# Altium PCB PCB4.PcbDoc
Units mil, origin at the board's own origin, x right, y up, seen from the top; angles counter-clockwise.
Board outline 5950.03 x 2950.03 mil, 2 copper layers (Top Layer, Bottom Layer); 86 components, 57 nets, 223 pads, 23 vias.
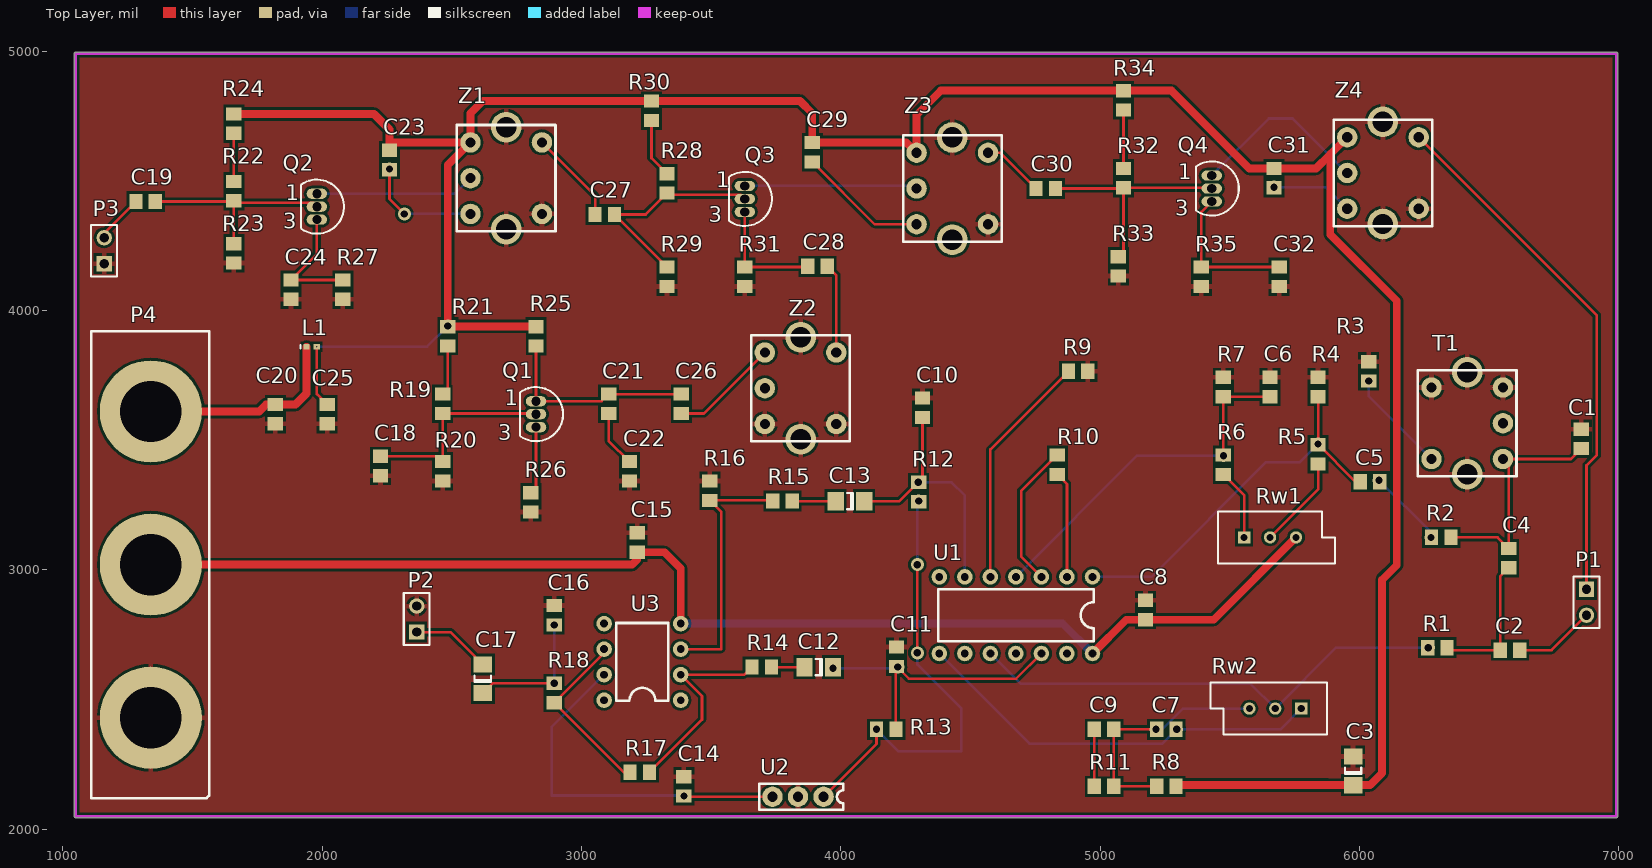
[diagram p0: Top Layer view]
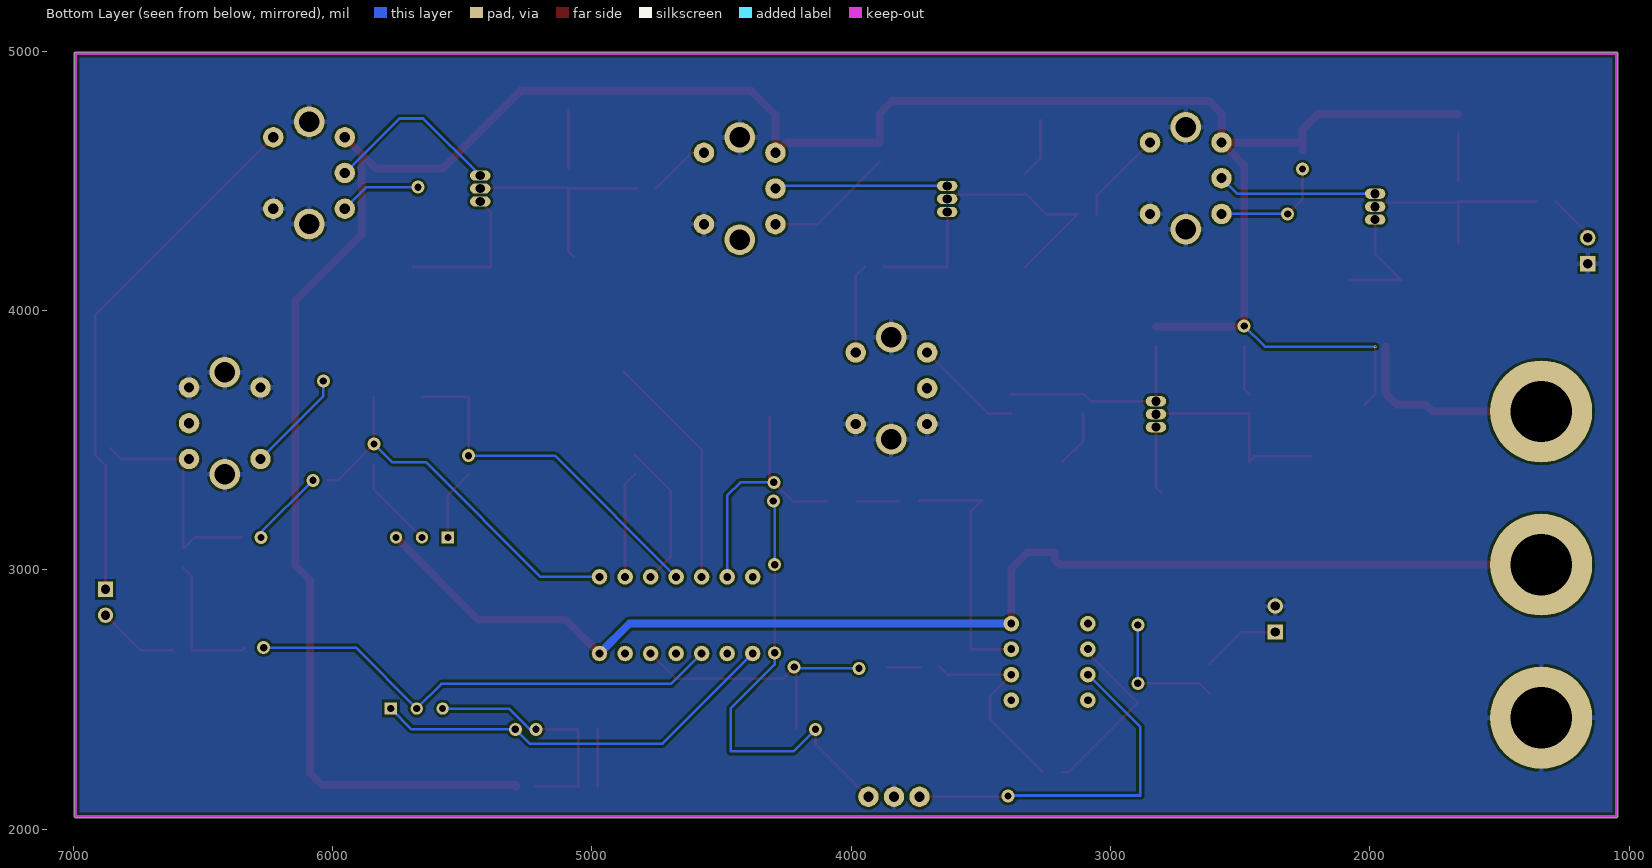
[diagram p1: Bottom Layer view, seen from below]

## Layer stack, top to bottom
Top Layer: signal copper 1.4
Dielectric: dielectric 12.6, FR-4, Dk 4.8
Bottom Layer: signal copper 1.4

## Board outline
1050,2044.98 cw(c1050,2050) 1044.98,2050 1044.98,4990 cw(c1050,4990) 1050,4995.02 6990,4995.02 cw(c6990,4990) 6995.02,4990 6995.02,2050 cw(c6990,2050) 6990,2044.98

## Design rules (kind name [scope] priority, off if disabled: settings)
Clearance [All] p1: gap=10
HoleSize [All] p1: absolutevalues=TRUE maxlimit=1000 minlimit=1 maxpercent=80.000 minpercent=20.000
HoleToHoleClearance [All] p1: gap=1 allowstackedmicrovias=TRUE
MinimumSolderMaskSliver [All] p1: minsoldermaskwidth=1
PolygonConnect [All] p1: connectstyle=Relief reliefconductorwidth=20 reliefentries=4 polygonreliefangle="90 Angle"
RoutingVias [All] p1: holewidth=28 width=50 viastyle="Through Hole" minholewidth=28 minwidth=50 maxholewidth=28 maxwidth=50
SilkscreenOverComponentPads [All] p1: minsilkscreentomaskgap=10
SolderMaskExpansion [All] p1: expansion=4
TestPointUsage [All] p1: valid=0 allowmultiple=FALSE
Testpoint [All] p1: side=15 testpointundercomponent=TRUE minsize=40 maxsize=100 preferedsize=60 minholesize=0 maxholesize=40 preferedholesize=32 testpointgrid=1 style=1023 order=0-112345678
Width [All] p1: maxlimit=100 minlimit=10 preferedwidth=10 toplayer_prefwidth=15 bottomlayer_prefwidth=15 minimp=50.000000 maximp=50.000000 favimp=50.000000
20 further rules are at their usual default settings.

## Classes and differential pairs
component class Sheet1: C1 C2 C3 C4 C5 C6 C7 C8 C9 C10 C11 C12 C13 C14 C15 C16 C17 P1 P2 R1 R2 R3 R4 R5 R6 R7 R8 R9 R10 R11 R12 R13 R14 R15 R16 R17 R18 Rw1 Rw2 T1 U1 U2 U3
component class Sheet2: C18 C19 C20 C21 C22 C23 C24 C25 C26 C27 C28 C29 C30 C31 C32 L1 P3 P4 Q1 Q2 Q3 Q4 R19 R20 R21 R22 R23 R24 R25 R26 R27 R28 R29 R30 R31 R32 R33 R34 R35 Z1 Z2 Z3 Z4

## Components (designator, comment, footprint, x,y, rotation, side; value= is the part's Value field where it differs from the comment)
C1 "Cap" 2012[0805] 6855,3505 r270 top
C2 "Cap" 2012[0805] 6580,2690 r180 top
C3 "Cap Pol1" C1206 5975,2225 r90 top
C4 "Cap" 2012[0805] 6575,3045 r270 top
C5 "Cap" 2012[0805] 6040,3340 r180 top
C6 "Cap" 2012[0805] 5655,3705 r270 top
C7 "Cap" 2012[0805] 5255,2385 r180 top
C8 "Cap" 2012[0805] 5175,2845 r270 top
C9 "Cap" 2012[0805] 5015,2385 r180 top
C10 "Cap" 2012[0805] 4315,3625 r270 top
C11 "Cap" 2012[0805] 4215,2665 r270 top
C12 "Cap Pol1" C1206 3915,2625 r180 top
C13 "Cap Pol1" C1206 4035,3265 r180 top
C14 "Cap" 2012[0805] 3395,2165 r270 top
C15 "Cap" 2012[0805] 3215,3105 r270 top
C16 "Cap" 2012[0805] 2895,2825 r270 top
C17 "Cap Pol1" C1206 2620,2580 r90 top
C18 "Cap" 2012[0805] 2225,3400 r270 top
C19 "Cap" 2012[0805] 1320,4420 r0 top
C20 "Cap" 2012[0805] 1820,3600 r90 top
C21 "Cap" 2012[0805] 3105,3640 r270 top
C22 "Cap" 2012[0805] 3185,3380 r270 top
C23 "Cap" 2012[0805] 2260,4580 r270 top
C24 "Cap" 2012[0805] 1880,4080 r90 top
C25 "Cap" 2012[0805] 2020,3600 r90 top
C26 "Cap" 2012[0805] 3385,3640 r90 top
C27 "Cap" 2012[0805] 3090,4370 r0 top
C28 "Cap" 2012[0805] 3910,4170 r0 top
C29 "Cap" 2012[0805] 3890,4610 r270 top
C30 "Cap" 2012[0805] 4790,4470 r0 top
C31 "Cap" 2012[0805] 5670,4510 r270 top
C32 "Cap" 2012[0805] 5690,4130 r90 top
L1 "Inductor" 0402-A 1960,3860 r0 top
P1 "Header 2" HDR1X2 6875,2925 r270 top
P2 "Header 2" HDR1X2 2365,2760 r90 top
P3 "Header 2" HDR1X2 1160,4180 r90 top
P4 "Header 3" shuru 1340,3020 r90 top
Q1 "NPN" TO-226 2825,3600 r180 top
Q2 "NPN" TO-226 1980,4400 r180 top
Q3 "NPN" TO-226 3630,4430 r180 top
Q4 "NPN" TO-226 5430,4470 r180 top
R1 "Res1" 2012[0805] 6300,2700 r180 top
R2 "Res1" 2012[0805] 6315,3125 r180 top
R3 "Res1" 2012[0805] 6035,3765 r270 top
R4 "Res1" 2012[0805] 5840,3705 r270 top
R5 "Res1" 2012[0805] 5840,3445 r270 top
R6 "Res1" 2012[0805] 5475,3405 r270 top
R7 "Res1" 2012[0805] 5475,3705 r270 top
R8 "Res1" 2012[0805] 5255,2165 r180 top
R9 "Res1" 2012[0805] 4915,3765 r180 top
R10 "Res1" 2012[0805] 4835,3405 r270 top
R11 "Res1" 2012[0805] 5015,2165 r180 top
R12 "Res1" 2012[0805] 4300,3300 r270 top
R13 "Res1" 2012[0805] 4175,2385 r180 top
R14 "Res1" 2012[0805] 3695,2625 r180 top
R15 "Res1" 2012[0805] 3775,3265 r180 top
R16 "Res1" 2012[0805] 3495,3305 r270 top
R17 "Res1" 2012[0805] 3225,2220 r180 top
R18 "Res1" 2012[0805] 2895,2525 r270 top
R19 "Res1" 2012[0805] 2465,3640 r90 top
R20 "Res1" 2012[0805] 2465,3380 r90 top
R21 "Res Adj1" 2012[0805] 2485,3900 r270 top
R22 "Res1" 2012[0805] 1660,4460 r90 top
R23 "Res1" 2012[0805] 1660,4220 r90 top
R24 "Res Adj1" 2012[0805] 1660,4720 r270 top
R25 "Res1" 2012[0805] 2825,3900 r90 top
R26 "Res1" 2012[0805] 2805,3260 r90 top
R27 "Res1" 2012[0805] 2080,4080 r90 top
R28 "Res1" 2012[0805] 3330,4490 r90 top
R29 "Res1" 2012[0805] 3330,4130 r90 top
R30 "Res Adj1" 2012[0805] 3270,4770 r270 top
R31 "Res1" 2012[0805] 3630,4130 r90 top
R32 "Res1" 2012[0805] 5090,4510 r90 top
R33 "Res1" 2012[0805] 5070,4170 r90 top
R34 "Res Adj1" 2012[0805] 5090,4810 r270 top
R35 "Res1" 2012[0805] 5390,4130 r90 top
Rw1 "RPot" VR5 5655,3125 r0 top
Rw2 "RPot" VR5 5675,2465 r180 top
T1 "zhongzhou" zhongzhou 6415,3565 r180 top
U1 "MC1496" MC1496 4675,2825 r180 top
U2 "LM7808" LM7808 3835,2125 r180 top
U3 "LM741" LM741 3235,2645 r180 top
Z1 "zhongzhou1" zhongzhou 2710,4510 r0 top
Z2 "zhongzhou2" zhongzhou 3845,3700 r0 top
Z3 "zhongzhou3" zhongzhou 4430,4470 r0 top
Z4 "zhongzhou4" zhongzhou 6090,4530 r0 top

## Footprints (in the part's own frame and the unit in brackets; to place one, negate y for a bottom-side part, rotate by r counter-clockwise, add the part's x,y. Pads: shape width x height; smd on the part's side, far side on the other; paste and mask are expansions set on the pad)
0402-A [mm] "Chip Inductor; Body 1 x 0.5 mm (LxW typ)"
  rect 0.6x0.5 smd: 1(-0.5,0) 2(0.5,0)
  silkscreen extent -1.1,-0.15 -1.1,0.15
2012[0805] [mm] "Chip Resistor; Body 2.0 x 1.3 mm (LxW typ)"
  rect 1.3x1.5 smd: 1(-0.95,0) 2(0.95,0)
C1206 [mm] "Chip Capacitor; Body 3.2 x 1.6 mm (LxW typ)"
  rect 1.6x1.8 smd: 1(-1.4,0) 2(1.4,0)
  silkscreen extent -0.3,-0.8 0.3,0.8
HDR1X2 [mm] "Connector; Header; 2 Position"
  rect 1.5x1.5 hole 0.9: 1(0,0)
  round 1.5 hole 0.9: 2(2.54,0)
  silkscreen extent -1.27,-1.27 3.81,1.27
LM741 [mil]
  round 60 hole 30: 1(-147.64,147.64) 2(-147.64,49.21) 3(-147.64,-49.21) 4(-147.64,-147.64) 5(147.64,-147.64) 6(147.64,-49.21) 7(147.64,49.21) 8(147.64,147.64)
  silkscreen extent -100,-150 100,150
LM7808 [mm]
  round 2 hole 1: 1(-2.5,0) 2(0,0) 3(2.5,0)
  silkscreen extent -4.44,-1.27 3.81,1.27
MC1496 [mil]
  round 60 hole 30: 1(-295.28,-147.64) 2(-196.85,-147.64) 3(-98.43,-147.64) 4(0,-147.64) 5(98.43,-147.64) 6(196.85,-147.64) 7(295.28,-147.64) 8(295.28,147.64) 9(196.85,147.64) 10(98.43,147.64) 11(0,147.64) 12(-98.43,147.64) 13(-196.85,147.64) 14(-295.28,147.64)
  silkscreen extent -300,-100 300,100
shuru [mm]
  round 10 hole 6: 1(-15,0) 2(0,0) 3(15,0)
  silkscreen extent -22.86,-5.72 22.86,5.84
TO-226 [mm] "TO, Flat Index; 3 In-Line, Axial Leads; Body Dia. 4.8mm; Leads 0.55 x 0.51 mm (max)"
  oval 2x1 hole 0.9: 1(0,-1.27) 2(0,0) 3(0,1.27)
  silkscreen extent -2.65,-2.65 1.55,2.65
VR5 [mm] "Potentiometer; 3 Leads"
  rect 1.2x1.2 hole 0.7: 1(-2.54,0)
  round 1.2 hole 0.7: 2(0,0) 3(2.54,0)
  silkscreen extent -5.08,-2.54 6.35,2.54
zhongzhou [mm]
  round 2 hole 1: 1(-3.5,3.5) 2(-3.5,0) 3(-3.5,-3.5) 4(3.5,-3.5) 5(3.5,3.5)
  round 3 hole 2: 6(0,5) 7(0,-5)
  silkscreen extent -4.83,-5.21 4.83,5.21

## Part data
C1 C2 C4 C5 C6 C7 C8 C9 C10 C11 C14 C15 C16 C18 C19 C20 C21 C22 C23 C24 C25 C26 C27 C28 C29 C30 C31 C32: "Capacitor"
C3 C12 C13 C17: "Polarized Capacitor (Radial)"
P1 P2 P3: "Header, 2-Pin"
P4: "Header, 3-Pin"
Q1 Q2 Q3 Q4: "NPN Bipolar Transistor"
R1 R2 R3 R4 R5 R6 R7 R8 R9 R10 R11 R12 R13 R14 R15 R16 R17 R18 R19 R20 R22 R23 R25 R26 R27 R28 R29 R31 R32 R33 R35: "Resistor"
R21 R24 R30 R34: "Variable Resistor"
Rw1 Rw2: "Potentiometer"
Z2: library part zhongzhou4
Z3: library part zhongzhou2
Z4: library part zhongzhou3

## Via types
v1: diameter 50, hole 28, Top Layer to Bottom Layer, 22 vias
v2: diameter 10, hole 5, Top Layer to Bottom Layer, 1 vias

## Nets (pads, with @x,y where several pads share a name; then routed paths per layer and width w, separated by ;. In a path a pad name is that pad's centre, name@x,y a point inside that pad or via, vN(x,y) a via of type N, cw(c..) or ccw(c..) an arc to the next point about the centre after c; other vN are vias at no path point)
+12V: C3.1 C23.1 C25.2 C29.1 C31.1 L1.2 R8.1 R21.1 R24.1 R25.2 R30.1 R34.1 Z1.1 Z3.1 Z4.1 | length 10235.6
  Top Layer w10: v2(1979.69,3860) 1979.69,3677.72 C25.2
  Top Layer w30: R24.1 2200,4757.4 2260,4697.4 2260,4647.8 ; C23.1 2260,4647.8 ; R21.1 R21.1@2485,3938 ; R25.2 2825,3938 R21.1@2485,3938 ; R8.1 5292.4,2170 5879,2170 5879.12,2169.88 C3.1 6040,2169.88 6087,2216.88 6087,2962 6143,3018 6143,4037 5887,4293 5887,4602.59 ; Z4.1 5887,4602.59 ; 2260,4647.8 Z1.1 ; R21.1@2485,3938 2485,4560.59 Z1.1 ; Z1.1 2572.2,4760 2619.61,4807.4 R30.1 3842.6,4807.4 3890,4760 C29.1 4252.6,4647.4 Z3.1 4292.2,4754.2 4385.4,4847.4 R34.1 5275,4847.4 5575,4547.4 C31.1 5831.81,4547.4 5887,4602.59
  Bottom Layer w10: v2(1979.69,3860) 2405,3860 v1(2485,3940)
-8V: C8.2 C15.2 P4.2 Rw1.3 U1.14 U3.4 | length 4922.3
  Top Layer w30: P4.2 3195,3020 3215,3040 C15.2 3320,3067.6 3382.64,3004.96 U3.4 ; U1.14 5100.51,2807.6 C8.2 5437.6,2807.6 Rw1.3
  Bottom Layer w30: U3.4 4855,2792.64 U1.14
GND: C1.1 C3.2 C6.1 C8.1 C10.1 C11.1 C14.1 C15.1 C16.1 C18.2 C20.1 C22.2 C24.1 C25.1 C32.1 P2.2 P3.1 P4.1 R3.1 R4.1 R7.1 R9.1 R16.1 R20.1 R23.1 R26.1 R27.1 R29.1 R31.1 R33.1 R35.1 T1.3 T1.4 T1.6 T1.7 U2.2 Z1.4 Z1.6 Z1.7 Z2.3 Z2.4 Z2.6 Z2.7 Z3.4 Z3.6 Z4.4 Z4.6 Z4.7
NetC1_2: C1.2 C4.1 R2.1 T1.1 | length 913.2
  Top Layer w10: R2.1 6532.4,3125 C4.1 6575,3405 T1.1 6814.61,3427.2 C1.2
NetC2_1: C2.1 P1.2 | length 313.5
  Top Layer w10: C2.1 6740,2690 P1.2
NetC2_2: C2.2 C4.2 R1.1 | length 540.4
  Top Layer w10: R1.1 6347.4,2690 C2.2 6542.6,2975.2 C4.2
NetC5_1: C5.1 R2.2 | length 302.8
  Bottom Layer w10: v1(6075,3345) 6275,3145 v1(6275,3125)
NetC5_2: C5.2 R4.2 R5.1 U1.1 | length 1505.8
  Top Layer w10: R5.1@5830,3492.4 R5.1 5841.53,3482.4 5978.93,3345 C5.2@6017.6,3345 ; R5.1@5840,3492.4 R4.2
  Bottom Layer w10: U1.1 5197.64,2972.64 5640,3415 5770,3415 v1(5840,3485)
NetC6_2: C6.2 R6.1 R7.2 U1.4 | length 1398.8
  Top Layer w10: R6.1 R7.2 C6.2
  Bottom Layer w10: U1.4 5142.36,3440 v1(5475,3440)
NetC7_1: C7.1 Rw2.1 U1.8 | length 1595.1
  Bottom Layer w10: U1.8 4727.09,2330 5240,2330 v1(5295,2385) 5695,2385 Rw2.1
NetC7_2: C7.2 C9.1 R8.2 R11.1 Rw2.3 | length 943.5
  Top Layer w10: R8.2 R11.1 C9.1 C7.2
  Bottom Layer w10: v1(5215,2385) 5238.43,2385 5318.43,2465 Rw2.3
NetC9_2: C9.2 R11.2 | length 220
  Top Layer w10: R11.2 C9.2
NetC10_2: C10.2 C13.1 R12.1 U1.6 | length 993.6
  Top Layer w10: C13.1 4226.07,3265 v1(4298.47,3337.4) R12.1 ; C10.2@4312.4,3585 C10.2 R12.1@4315,3352.4
  Bottom Layer w10: v1(4298.47,3337.4) 4427.6,3337.4 4478.15,3286.85 U1.6
NetC11_2: C11.2 C12.1 R13.1 U1.12 | length 1114.2
  Top Layer w10: R13.1 4212.4,2625 C11.2 4262.6,2580 4676.06,2580 U1.12
  Bottom Layer w10: v1(3970,2620) 4215,2620 v1(4220,2625)
NetC12_2: C12.2 R14.1 | length 127.5
  Top Layer w10: R14.1 C12.2
NetC13_2: C13.2 R15.1 | length 167.5
  Top Layer w10: R15.1 C13.2
NetC14_2: C14.2 U2.3 U3.7 | length 1403.3
  Top Layer w10: v1(3395,2127.6) 3397.6,2125 U2.3
  Bottom Layer w10: U3.7 2885,2393.43 2885,2130 3392.6,2130 v1(3395,2127.6)
NetC16_2: C16.2 C17.1 R18.1 | length 515.7
  Top Layer w10: C17.1 2657.52,2562.4 v1(2895,2562.4)
  Bottom Layer w10: v1(2895,2562.4) v1(2895,2787.6)
NetC17_2: C17.2 P2.1 | length 306.7
  Top Layer w10: P2.1 2495.12,2760 C17.2
NetC18_1: C18.1 Q1.2 R19.1 R20.2 | length 794.6
  Top Layer w10: C18.1 2445,3437.4 R20.2 R19.1 2822.4,3602.6 Q1.2
NetC19_1: C19.1 P3.2 | length 190.8
  Top Layer w10: P3.2 1160,4297.4 C19.1
NetC19_2: C19.2 Q2.2 R22.1 R23.2 | length 798.2
  Top Layer w10: C19.2 1657.4,4420 R22.1 ; R23.2 R22.1 ; Q2.2 1964.69,4415.32 1667.28,4415.32 R22.1
NetC20_2: C20.2 L1.1 P4.3 | length 809.1
  Top Layer w30: P4.3 1757.55,3610.55 1784.4,3637.4 C20.2 1897.72,3637.4 1940.32,3680 L1.1
NetC21_1: C21.1 C26.2 Q1.1 R25.1 | length 783.9
  Top Layer w10: R25.1 Q1.1 3077.6,3650 C21.1 C26.2
NetC21_2: C21.2 C22.1 | length 218.3
  Top Layer w10: C21.2 3105,3497.4 C22.1
NetC23_2: C23.2 Z1.3 | length 449.1
  Top Layer w10: C23.2 2260,4429.41 v1(2317.2,4372.2)
  Bottom Layer w10: v1(2317.2,4372.2) Z1.3
  other v1: 2260,4545
NetC24_2: C24.2 Q2.3 R27.2 | length 474
  Top Layer w10: Q2.3 1980,4217.4 C24.2 R27.2
NetC26_1: C26.1 Z2.1 | length 419.6
  Top Layer w10: C26.1 3472.01,3602.6 Z2.1
NetC27_1: C27.1 Z1.5 | length 362.6
  Top Layer w10: Z1.5 3052.6,4442.99 C27.1
NetC27_2: C27.2 Q3.2 R28.1 R29.2 | length 832.7
  Top Layer w10: R29.2 C27.2 3247.4,4370 R28.1 3337.28,4445.32 3614.69,4445.32 Q3.2
NetC28_1: C28.1 Q3.3 R31.2 | length 456.3
  Top Layer w10: Q3.3 R31.2 3870,4167.4 C28.1
NetC28_2: C28.2 Z2.5 | length 346.9
  Top Layer w10: C28.2 3982.8,4134.61 Z2.5
NetC29_2: C29.2 Z3.3 | length 501.8
  Top Layer w10: C29.2 4130.39,4332.2 Z3.3
NetC30_1: C30.1 Z3.5 | length 241.9
  Top Layer w10: Z3.5 4614.8,4607.8 C30.1
NetC30_2: C30.2 Q4.2 R32.1 R33.2 | length 878.2
  Top Layer w10: C30.2 5087.4,4470 R32.1 ; R33.2 5090,4227.4 R32.1 ; Q4.2 5427.4,4472.6 R32.1
NetC31_2: C31.2 Z4.3 | length 316.5
  Bottom Layer w10: v1(5670,4475) 5869.41,4475 Z4.3
NetC32_2: C32.2 Q4.3 R35.2 | length 569.2
  Top Layer w10: Q4.3 5390,4380 R35.2 C32.2
NetQ1_3: Q1.3 R26.2 | length 260.9
  Top Layer w10: R26.2 2825,3317.4 Q1.3
NetQ2_1: Q2.1 Z1.2 | length 617.1
  Bottom Layer w10: Q2.1 2512.2,4450 Z1.2
NetQ3_1: Q3.1 Z3.2 | length 666.3
  Bottom Layer w10: Q3.1 4282.2,4480 Z3.2
NetQ4_1: Q4.1 Z4.2 | length 700.3
  Bottom Layer w10: Q4.1 5650,4740 5742.2,4740 Z4.2
NetR1_2: R1.2 Rw2.2 U1.10 | length 1873.7
  Bottom Layer w10: U1.10 4693.94,2560 5580,2560 Rw2.2 5910,2700 v1(6265,2700)
NetR3_2: R3.2 T1.5 | length 400.7
  Bottom Layer w10: v1(6035,3727.6) 6035,3669.41 T1.5
NetR5_2: R5.2 Rw1.2 | length 359.2
  Top Layer w10: Rw1.2 5840,3310 R5.2
NetR6_2: R6.2 Rw1.1 | length 275.7
  Top Layer w10: R6.2 5555,3287.6 Rw1.1
NetR9_2: R9.2 U1.5 | length 917.1
  Top Layer w10: U1.5 4576.57,3463.98 R9.2
NetR10_1: R10.1 U1.3 | length 561.1
  Top Layer w10: U1.3 4695,3051.06 4695,3303.93 4833.47,3442.4 R10.1
NetR10_2: R10.2 U1.2 | length 410.2
  Top Layer w10: R10.2 4871.85,3330.75 U1.2
NetR12_2: R12.2 R13.2 U2.1 | length 1744.7
  Top Layer w10: U2.1 4137.6,2329.17 v1(4137.6,2385) ; v1(4295,2680) v1(4295,3020)
  Bottom Layer w10: v1(4137.6,2385) 4222.6,2300 4465,2300 4465,2465 4295,2635 v1(4295,2680) ; v1(4295,3020) 4295,3260 v1(4300,3265)
NetR14_2: R14.2 R17.1 U3.2 | length 780.9
  Top Layer w10: R17.1 3465,2422.6 3465,2513.43 U3.2 3628.39,2595.79 R14.2
NetR15_2: R15.2 R16.2 U3.3 | length 991.9
  Top Layer w10: U3.3 3539.21,2694.21 3539.21,3223.39 R16.2 3735,3267.6 R15.2
NetR17_2: R17.2 R18.2 U3.6 | length 690.6
  Top Layer w10: U3.6 3087.36,2678.43 2896.53,2487.6 R18.2 3162.6,2220 R17.2
NetR19_2: R19.2 R21.2 | length 193.5
  Top Layer w10: R19.2 2485,3697.4 R21.2
NetR22_2: R22.2 R24.2 | length 185.2
  Top Layer w10: R22.2 R24.2
NetR28_2: R28.2 R30.2 | length 230
  Top Layer w10: R30.2 3270,4587.4 R28.2
NetR32_2: R32.2 R34.2 | length 225.2
  Top Layer w10: R32.2 R34.2
ZHONGFANG: P1.1 Z4.5 | length 2044
  Top Layer w10: Z4.5 6915,3980.59 6915,3442.48 6875,3402.48 P1.1
pads on no net: T1.2 U1.7 U1.9 U1.11 U1.13 U3.1 U3.5 U3.8 Z2.2 Z3.7

## Polygon pours and split planes (outlines as drawn)
GND on Top Layer "Top Layer-No Net" (solid): 1055,4990 1055,2055 1050,2050 6990,2050 6990,4990
GND on Bottom Layer "Top Layer-No Net" (solid): 1050,4990 1050,2050 6990,2050 6990,4990

## Keep-outs
Keep-Out Layer:
  lines w10: 1050,2050 1050,4990 6990,4990 6990,2050 1050,2050

## Text inside footprints (layer, text, board x,y; h text height)
Q1: Top Overlay "3" at 2680,3500 h59.05; Top Overlay "1" at 2705,3635 h59.05
Q2: Top Overlay "3" at 1850,4315 h59.05; Top Overlay "1" at 1860,4425 h59.05
Q3: Top Overlay "3" at 3490,4340 h59.05; Top Overlay "1" at 3520,4475 h59.05
Q4: Top Overlay "3" at 5290,4365 h59.05; Top Overlay "1" at 5300,4505 h59.05